# Altium PCB Current-Sensor-Rev1.PcbDoc
Units mil, origin at the board's own origin, x right, y up, seen from the top; angles counter-clockwise.
Board outline 1574.8 x 1574.8 mil, 2 copper layers (Top Layer, Bottom Layer); 25 components, 11 nets, 56 pads, 114 vias.
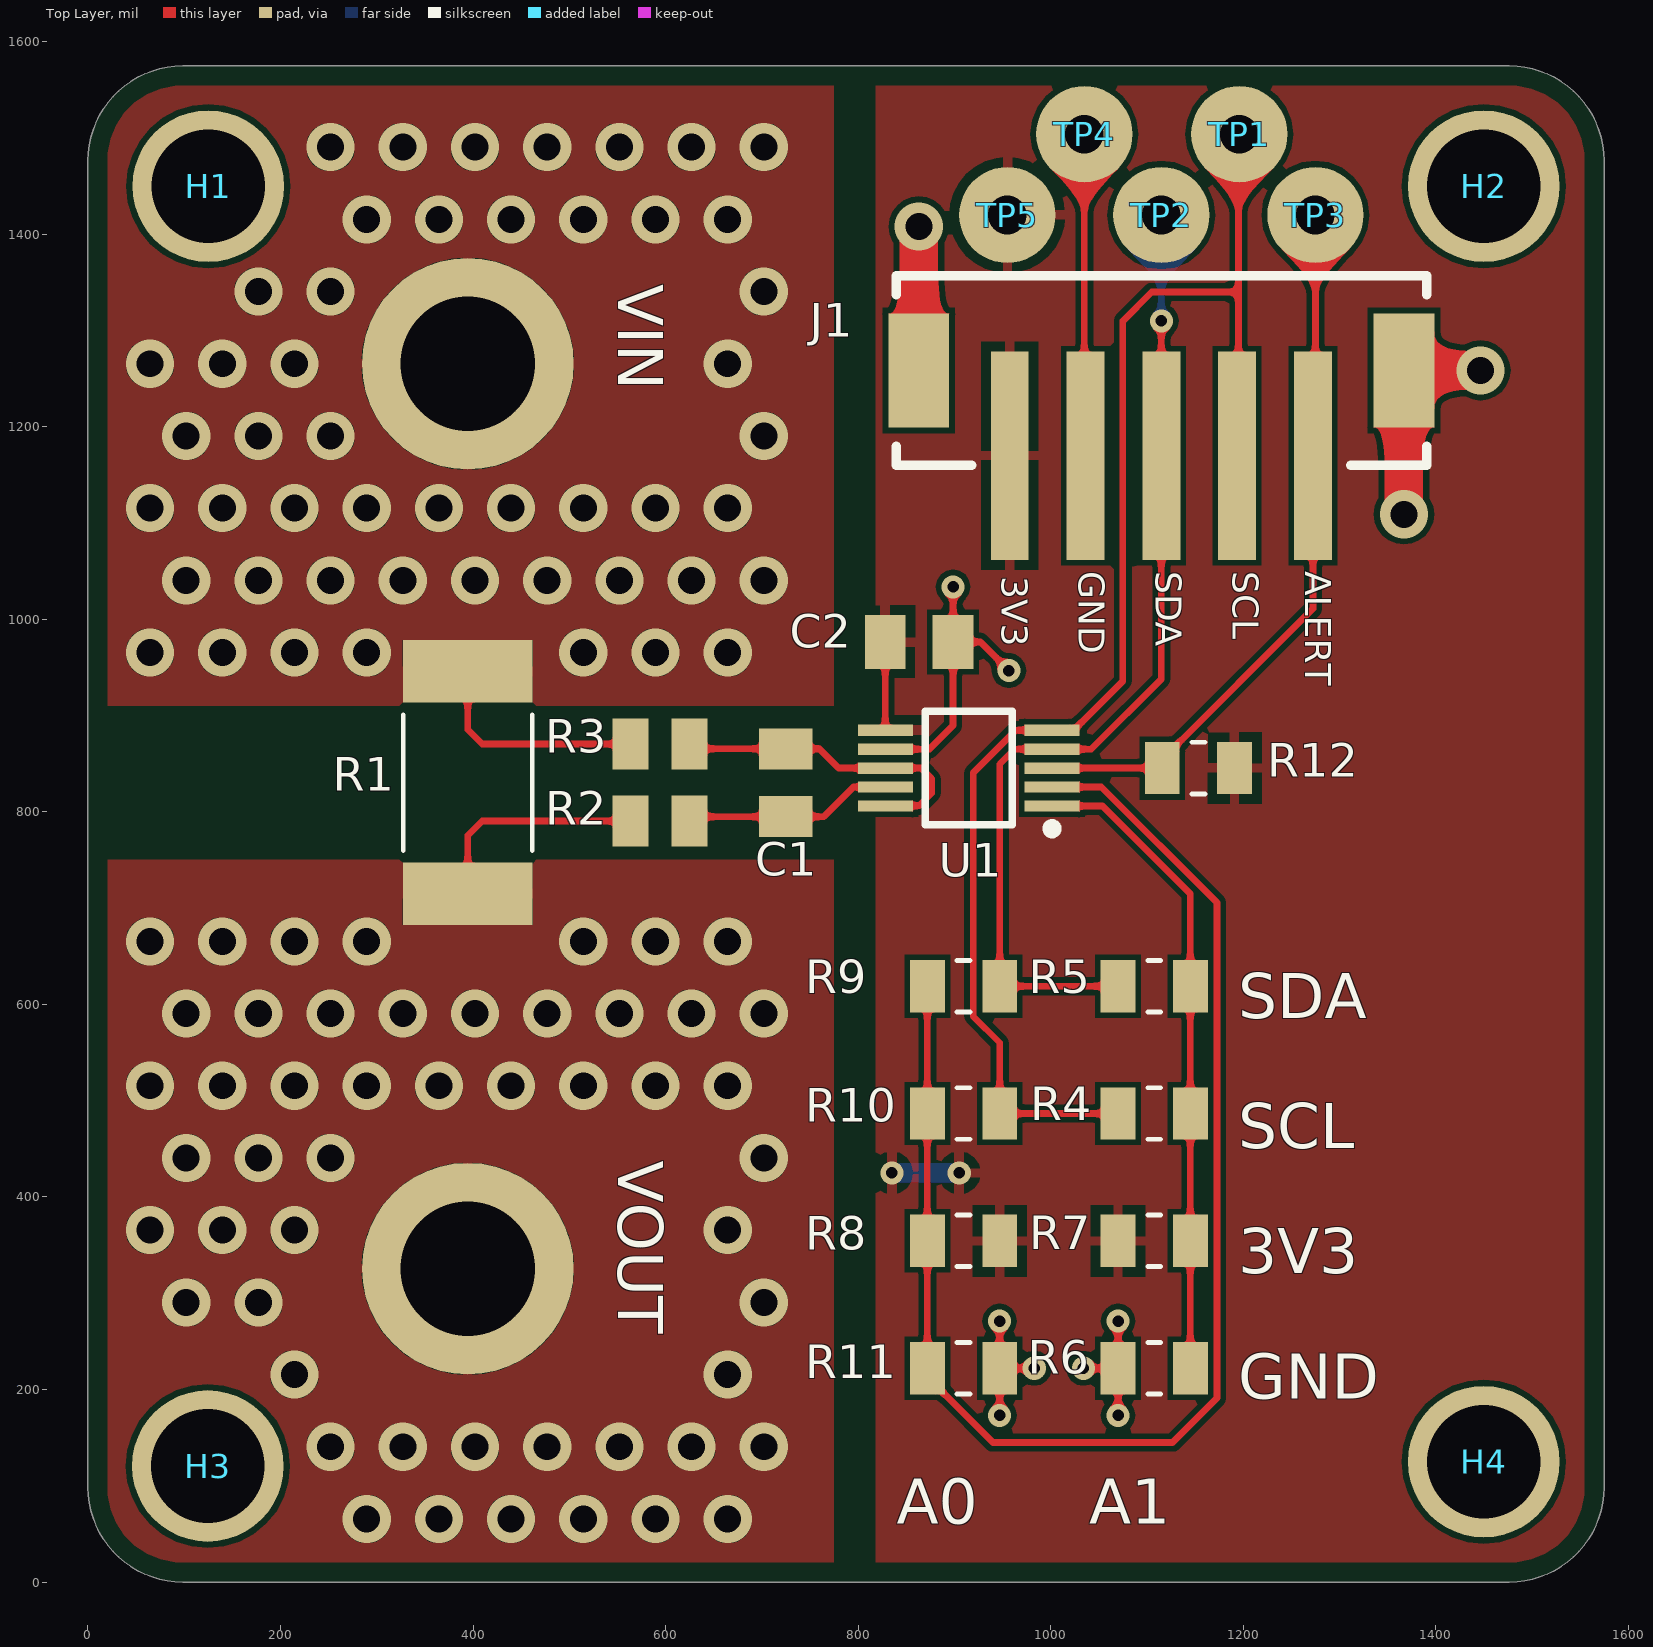
[diagram p0: Top Layer view]
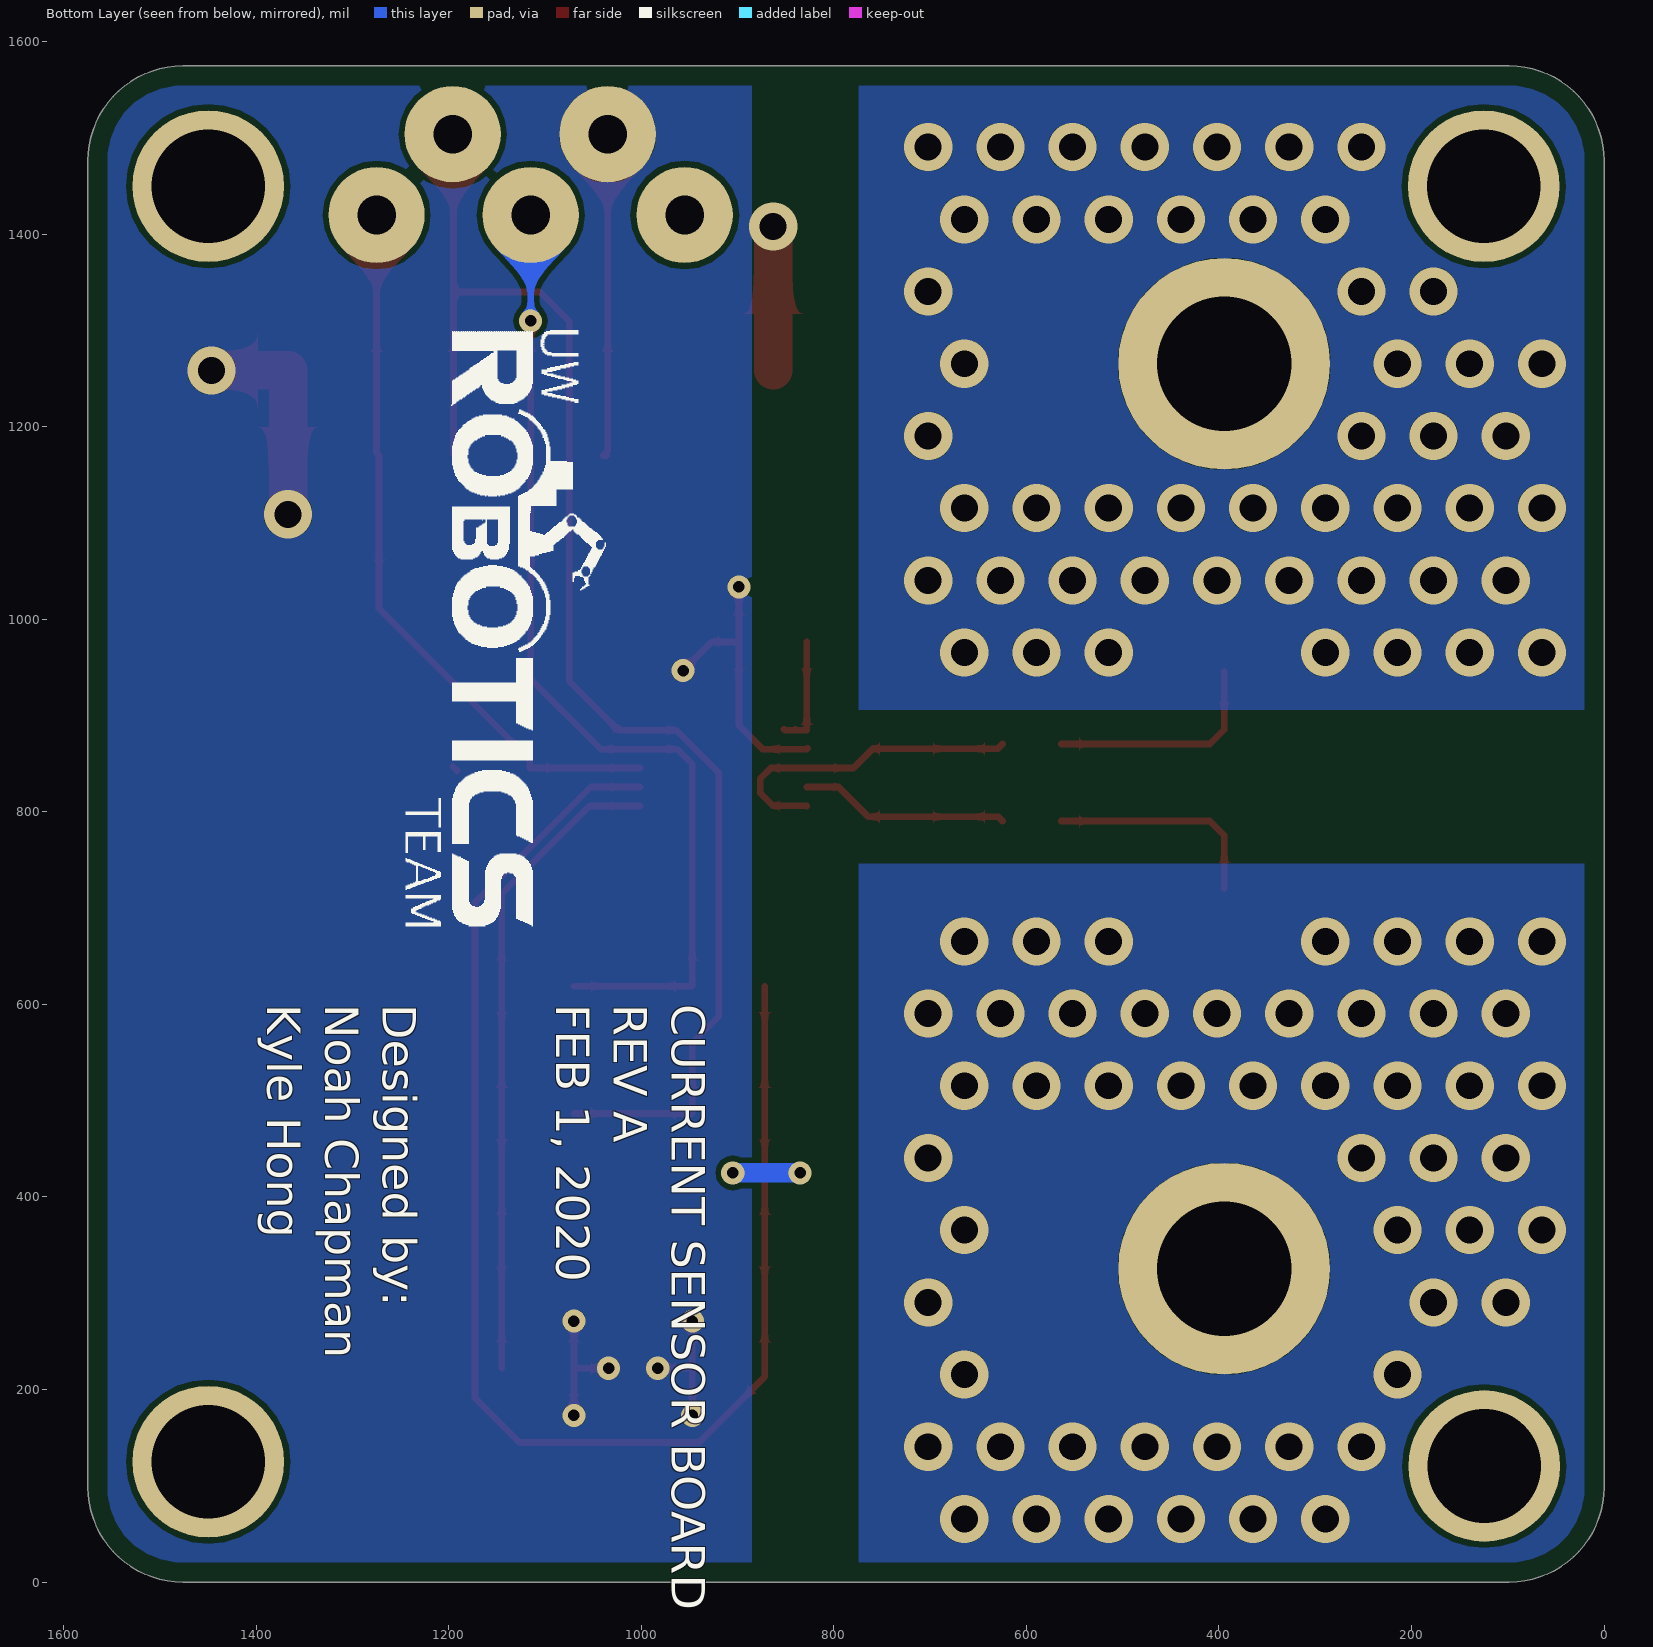
[diagram p1: Bottom Layer view, seen from below]
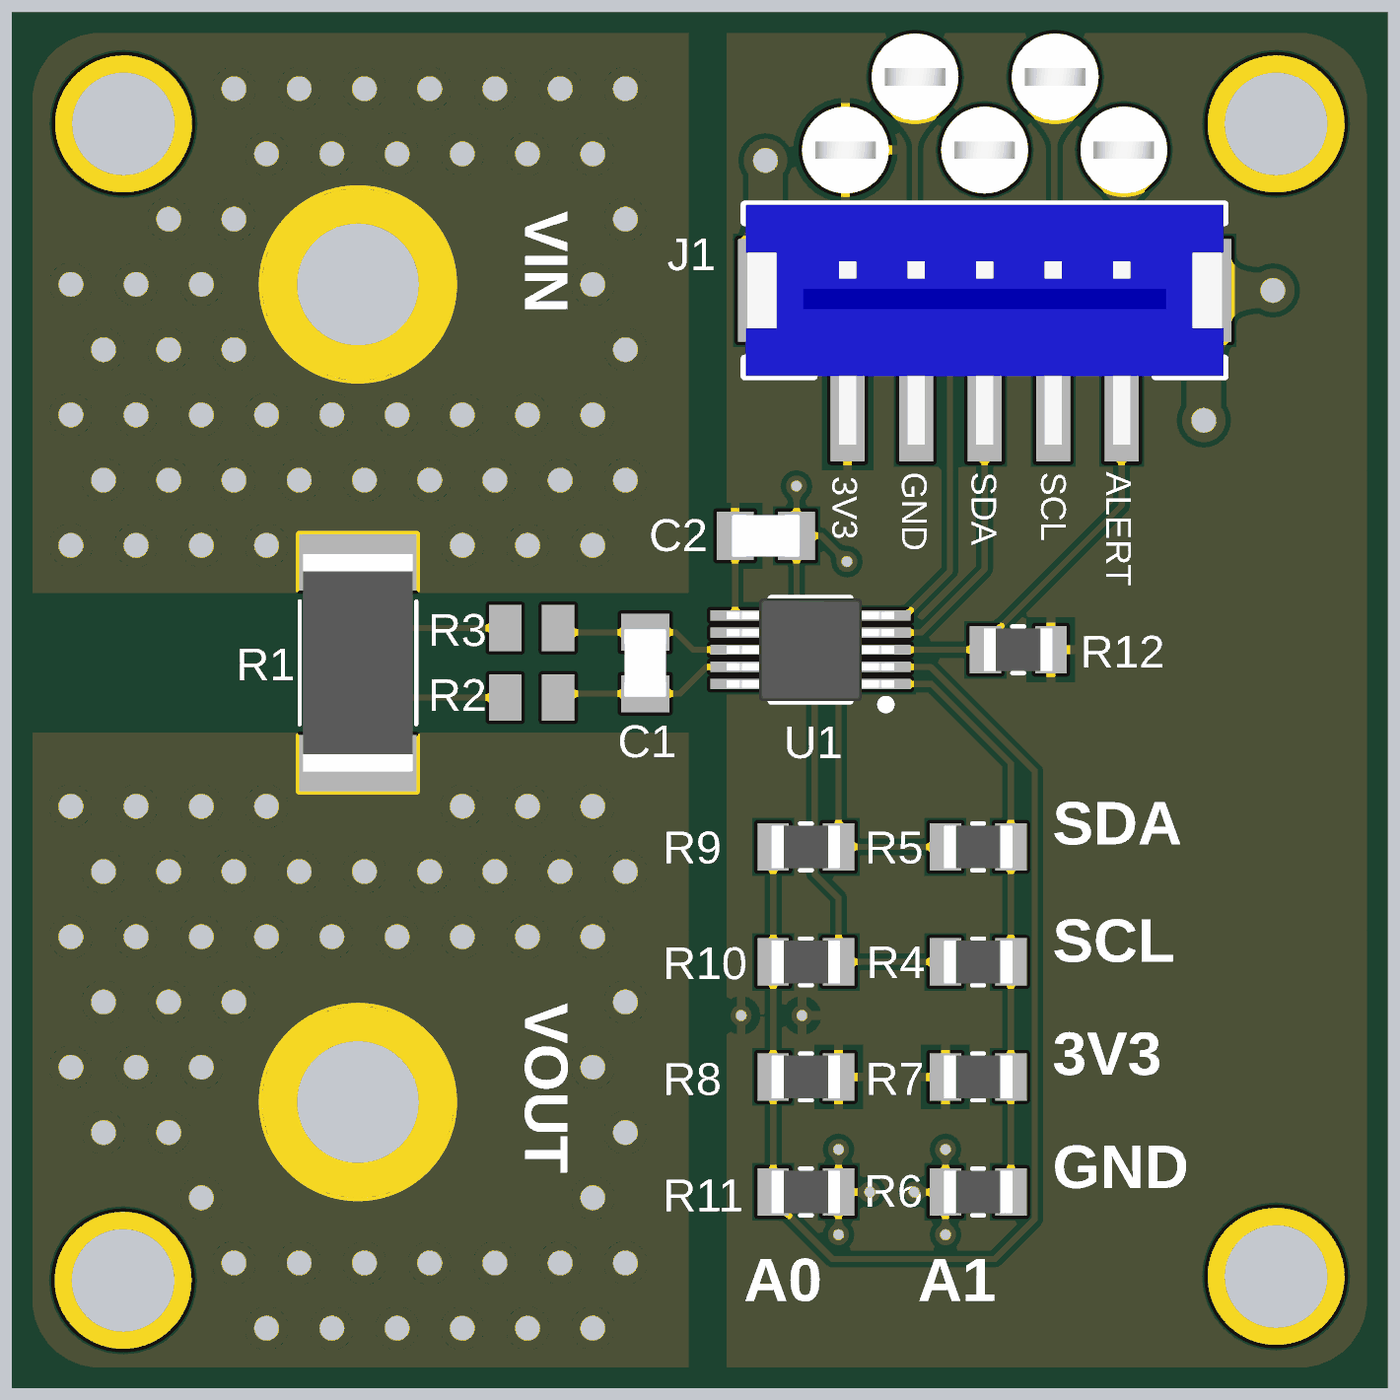
[diagram p2: 3D render of the assembled board from above, using the file's embedded part models]

## Layer stack, top to bottom
Top Solder: solder mask 0.4, Solder Resist, Dk 3.5
Top Layer: signal copper 1.4
Dielectric 1: dielectric 12.6, FR-4, Dk 4.8
Bottom Layer: signal copper 1.4
Bottom Solder: solder mask 0.4, Solder Resist, Dk 3.5

## Board outline
0,98.43 0,1476.38 cw(c98.43,1476.38) 98.43,1574.8 1476.38,1574.8 cw(c1476.38,1476.38) 1574.8,1476.38 1574.8,98.43 cw(c1476.38,98.43) 1476.38,0 98.43,0 cw(c98.43,98.43)

## Design rules (kind name [scope] priority, off if disabled: settings)
BoardOutlineClearance [All] p1: gap=20 ignorepadtopadclearanceinfootprint=FALSE
Clearance [All] p1: gap=6 ignorepadtopadclearanceinfootprint=TRUE
HoleSize [All] p1: absolutevalues=TRUE maxlimit=200 minlimit=1 maxpercent=80.000 minpercent=20.000
MinimumSolderMaskSliver [All] p1: minsoldermaskwidth=6
PolygonConnect 3V3 [InNet('3V3')] p1: connectstyle=Relief reliefconductorwidth=10 reliefentries=4 polygonreliefangle="90 Angle" airgapwidth=10
PolygonConnect "VIN VOUT" [InNet('Vin') vs InNet('Vout')] p2: connectstyle=Direct reliefconductorwidth=20 reliefentries=4 polygonreliefangle="90 Angle" airgapwidth=10
RoutingVias [All] p1: holewidth=12 width=24 viastyle="Through Hole" minholewidth=12 minwidth=24 maxholewidth=28 maxwidth=50
SilkToSolderMaskClearance [IsPad] p1: minsilkscreentomaskgap=6 clearancetoexposedcopper=TRUE
SolderMaskExpansion [All] p1: expansion=4
Width [All] p1: maxlimit=50 minlimit=6 preferedwidth=6 minimp=50.000000 maximp=50.000000 favimp=50.000000
27 further rules are at their usual default settings.

## Components (designator, comment, footprint, x,y, rotation, side; value= is the part's Value field where it differs from the comment)
C1 "CAP_0.1uF_50V_0805" CAPC2012X140N 724.82,830.26 r270 top value=0.1uF
C2 "CAP_0.1uF_50V_0805" CAPC2012X140N 863.44,976.5 r180 top value=0.1uF
H1 "MOUNTING_HOLES" MOUNTING_HOLE 125,1450 r0 top
H2 "MOUNTING_HOLES" MOUNTING_HOLE 1450,1450 r0 top
H3 "MOUNTING_HOLES" MOUNTING_HOLE 124.5,120.5 r0 top
H4 "MOUNTING_HOLES" MOUNTING_HOLE 1450,125 r0 top
J1 "CON_5M_SM4" JST-B5B-SM4-TB 1115,1357.01 r180 top
R1 "RES_20m_2512" RESC6532X75N 394.5,830.5 r270 top value=0.02
R2 "RES_5.1_0805" RESC2013X70X40LL20T20 594.3,790.5 r180 top value=5.1
R3 "RES_5.1_0805" RESC2013X70X40LL20T20 594.3,870.5 r180 top value=5.1
R4 "RES_4K7_0805" RESC2012X60N 1107.5,486.61 r180 top value=4K7
R5 "RES_4K7_0805" RESC2012X60N 1107.5,618.83 r180 top value=4K7
R6 "RES_4K7_0805" RESC2012X60N 1107.5,222.17 r180 top value=4K7
R7 "RES_4K7_0805" RESC2012X60N 1107.5,354.39 r180 top value=4K7
R8 "RES_4K7_0805" RESC2012X60N 909.5,354.39 r0 top value=4K7
R9 "RES_4K7_0805" RESC2012X60N 909.5,618.83 r0 top value=4K7
R10 "RES_4K7_0805" RESC2012X60N 909.5,486.61 r0 top value=4K7
R11 "RES_4K7_0805" RESC2012X60N 909.5,222.17 r0 top value=4K7
R12 "RES_4K7_0805" RESC2012X60N 1153.5,845.5 r0 top value=4K7
TP1 "TESTPOINT_LOOP" TESTPOINT_LOOP 1196,1504 r0 top
TP2 "TESTPOINT_LOOP" TESTPOINT_LOOP 1115,1420 r0 top
TP3 "TESTPOINT_LOOP" TESTPOINT_LOOP 1275,1420 r0 top
TP4 "TESTPOINT_LOOP" TESTPOINT_LOOP 1035,1504 r0 top
TP5 "TESTPOINT_LOOP" TESTPOINT_LOOP 955,1420 r0 top
U1 "INA226AIDGSR" INA226AIDGSR 914.82,845.5 r180 top

## Footprints (in the part's own frame and the unit in brackets; to place one, negate y for a bottom-side part, rotate by r counter-clockwise, add the part's x,y. Pads: shape width x height; smd on the part's side, far side on the other; paste and mask are expansions set on the pad)
CAPC2012X140N [mm]
  rect 1.08x1.42 smd: 1(-0.895,0) 2(0.895,0)
  body extent -1,-0.62 1,0.62, height 1.4
INA226AIDGSR [mm]
  rect 1.45x0.3 smd: 1(-2.2,1) 2(-2.2,0.5) 3(-2.2,0) 4(-2.2,-0.5) 5(-2.2,-1) 6(2.2,-1) 7(2.2,-0.5) 8(2.2,0) 9(2.2,0.5) 10(2.2,1)
  silkscreen extent -2.33,-1.5 1.15,1.73, body extent -2.45,-1.5 2.45,1.5, height 1.06
JST-B5B-SM4-TB [mm]
  rect 1.6x3 smd: 0(-6.4,2.5) 0(6.4,2.5)
  rect 1x5.5 smd: 1(-4,4.75) 2(-2,4.75) 3(0,4.75) 4(2,4.75) 5(4,4.75)
  silkscreen extent -7,0 7,5, body extent -6.98,0 6.98,7, height 6.6
MOUNTING_HOLE [mm]
  round 4 hole 3 unplated: 0(0,0)
RESC2012X60N [mm]
  rect 0.92x1.38 smd: 1(-0.955,0) 2(0.955,0)
  silkscreen extent -0.17,-0.68 0.17,0.68, body extent -1,-0.62 1,0.62, height 0.6
RESC2013X70X40LL20T20 [mm] "Chip Resistor, 2-Leads, Body 2.00x1.25mm, IPC High Density"
  rect 0.95x1.35 smd: 1(-0.775,0) 2(0.775,0)
  body extent -1.1,-0.72 1.1,0.72, height 0.7
RESC6532X75N [mm]
  rect 1.64x3.42 smd: 1(-2.935,0) 2(2.935,0)
  silkscreen extent -1.79,-1.7 1.79,1.7, body extent -3.17,-1.6 3.17,1.6, height 0.65
TESTPOINT_LOOP [mm]
  round 2.54 hole 1.02: 1(0,0)
  body extent -1.27,-1.27 1.27,1.27, height 4.57

## Part data
C1 C2: "CAP CER 0.1UF 50V X7R 0805", Capacitance=100nF, Case/Package=0805, Case Code (Metric)=2012, Dielectric=X7R, Manufacturer 1=Murata, Manufacturer Part Number 1=GCD21BR71H104KA01L, Max Operating Temperature=125°C, Min Operating Temperature=-55°C, Ratings=AEC-Q200, Supplier Part Number 1=490-11955-1-ND, Tolerance=10%, Voltage Rating=50V, Case Code (Imperial)=0805, ComponentLink1Description=https://datasheet.ciiva.com/29537/c03e-29537701.pdf?src-supplier=Digi-Key, ComponentLink1URL=https://datasheet.ciiva.com/29537/c03e-29537701.pdf?src-supplier=Digi-Key, Depth=1.25mm, Height=1.25mm, Length=2mm, Mount="Surface Mount", Supplier 1=Digi-Key, Termination=SMD/SMT, Thickness=0.049inch, Width=0.049inch
H1 H2 H3 H4: "6cm x 6cm"
J1: "CONN HEADER SMD 5POS 2MM", Manufacturer=JST, Manufacturer Part Number=B5B-PH-SM4-TB(LF)(SN), Max Current Rating=2A, Max Voltage Rating=100V, Supplier Part Number 1=455-1737-1-ND, ComponentLink1Description=https://datasheet.ciiva.com/11749/0900766b80ddea81-11749188.pdf?src-supplier=RSComponents, ComponentLink1URL=https://datasheet.ciiva.com/11749/0900766b80ddea81-11749188.pdf?src-supplier=RSComponents, ComponentLink2Description=https://datasheet.ciiva.com/712/eph-712595.pdf?src-supplier=Digi-Key, ComponentLink2URL=https://datasheet.ciiva.com/712/eph-712595.pdf?src-supplier=Digi-Key, ComponentLink3Description=https://datasheet.ciiva.com/712/eph-712596.pdf?src-supplier=Digi-Key, ComponentLink3URL=https://datasheet.ciiva.com/712/eph-712596.pdf?src-supplier=Digi-Key, ComponentLink4Description=https://datasheet.ciiva.com/730/eph-730612.pdf?src-supplier=Digi-Key, ComponentLink4URL=https://datasheet.ciiva.com/730/eph-730612.pdf?src-supplier=Digi-Key, ComponentLink5Description=https://datasheet.ciiva.com/16344/eph-16344920.pdf?src-supplier=Future+Electronics, ComponentLink5URL=https://datasheet.ciiva.com/16344/eph-16344920.pdf?src-supplier=Future+Electronics, Pitch=2mm, Supplier 1=Digi-Key
R1: "RES 0.02 OHM 1% 3W 2512", Manufacturer 1=Riedon, Manufacturer Part Number 1=CSRL3-0R02F8, Supplier Part Number 1=696-1840-1-ND, Pricing 1="1=0.66000, 10=0.47400, 25=0.36920, 50=0.31260, 100=0.24620, 250=0.20836, 500=0.17048, 1000=0.13259 (USD)", RoHS=No, Supplier 1=Digi-Key
R2 R3: "RES SMD 5.1 OHM 5% 1/8W 0805", Manufacturer=Panasonic, Part Number=ERJ-6GEYJ5R1V, Supplier Part Number 1=P5.1ACT-ND, Supplier 1=Digi-Key
R4 R5 R6 R7 R8 R9 R10 R11 R12: "RES SMD 4.7K OHM 5% 1/8W 0805", Case/Package=Molded, Case Code (Imperial)=0805, Case Code (Metric)=2012, Manufacturer 1=Yageo, Manufacturer Part Number 1=RC0805JR-074K7L, Max Operating Temperature=155°C, Min Operating Temperature=-55°C, Power Rating=125mW, Resistance=4.7kR, Supplier Part Number 1=311-4.7KARCT-ND, Temperature Coefficient=100ppm/°C, Tolerance=5%, Voltage Rating=150V, ComponentLink1Description=https://datasheet.ciiva.com/7941/442941-7941973.pdf?src-supplier=Element14, ComponentLink1URL=https://datasheet.ciiva.com/7941/442941-7941973.pdf?src-supplier=Element14, ComponentLink2Description=https://datasheet.ciiva.com/7941/442941-7941974.pdf?src-supplier=Element14, ComponentLink2URL=https://datasheet.ciiva.com/7941/442941-7941974.pdf?src-supplier=Element14, ComponentLink3Description=https://datasheet.ciiva.com/17486/rc0805-17486827.pdf?src-supplier=Future+Electronics, ComponentLink3URL=https://datasheet.ciiva.com/17486/rc0805-17486827.pdf?src-supplier=Future+Electronics, ComponentLink4Description=https://datasheet.ciiva.com/12667/rc0805-12667037.pdf?src-supplier=Mouser, ComponentLink4URL=https://datasheet.ciiva.com/12667/rc0805-12667037.pdf?src-supplier=Mouser, Composition="Thick Film", Contact Plating=Tin,Lead,Matte, Depth=1.25mm, Lead Free="Lead Free", Length=2mm, Military Standard=Not, Packaging="Tape and Reel", Pricing 1="1=0.10000, 10=0.03500, 100=0.01400, 1000=0.00631, 2500=0.00548 (USD)", Radiation Hardening=No, REACH SVHC=Unknown, RoHS=Yes, Stock 1=2755291, Supplier 1=Digi-Key, Termination=SMD/SMT
TP1 TP2 TP3 TP4 TP5: "Loop testpoint through-hole pad", Manufacturer="Keystone Electronics", Manufacturer Part Number 1=5002, Supplier Part Number 1=36-5002-ND, Supplier 1=Digi-Key
U1: "IC MONITOR PWR/CURR BIDIR 10MSOP", Package="MSOP-10 Texas Instruments", Supplier Part Number 1=296-29034-6-ND, Availability=Unavailable, MF="Texas Instruments", MP=INA226AIDGSR, Price=None, SnapEDA_Link=https://www.snapeda.com/parts/INA226AIDGSR/Texas%20Instruments/view-part/53552/?ref=snap, Supplier 1=Digi-Key

## Free pads (board coordinates)
  round 220 hole 140: 2(394.5,1265.5) 3(394.5,325.5)

## Via types
v1: diameter 50, hole 28, Top Layer to Bottom Layer, tented both sides, 103 vias
v2: diameter 24, hole 12, Top Layer to Bottom Layer, tented both sides, 11 vias

## Nets (pads, with @x,y where several pads share a name; then routed paths per layer and width w, separated by ;. In a path a pad name is that pad's centre, name@x,y a point inside that pad or via, vN(x,y) a via of type N, cw(c..) or ccw(c..) an arc to the next point about the centre after c; other vN are vias at no path point)
3V3: C2.2 J1.5 R7.2 R8.2 R12.2 TP5.1 U1.6 | length 193.6
  Top Layer w7: C2.2 U1.6 U1.6@839.19,884.87 ; U1.6@840.05,885.73 U1.6@839.19,884.87 ; U1.6@851.74,885.77 850.84,884.87 U1.6@839.19,884.87 ; R12.2@1191.1,842.5 R12.2@1195.9,847.3
  Bottom Layer w20: v2(835,425) v2(905,425)
A0: R8.1 R9.1 R10.1 R11.1 U1.2 | length 1489.5
  Top Layer w7: R9.1 R10.1 R8.1 R11.1 871.9,213.11 940.02,145 1126.65,145 1172.71,191.07 1172.71,705.67 1052.57,825.81 U1.2
A1: R4.1 R5.1 R6.1 R7.1 U1.1 | length 674.2
  Top Layer w7: U1.1 1053.87,806.13 1145.1,714.9 R5.1 R4.1 R7.1 R6.1
ALERT: J1.1 R12.1 TP3.1 U1.3 | length 754.9
  Top Layer w7: U1.3 R12.1 1115.9,854.55 1272.48,1011.13 J1.1 1275,1172.52 TP3.1
GND: C2.1 J1.0 J1.4 R6.2 R11.2 TP4.1 U1.7 | length 1278.8
  Top Layer w7: U1.7@827.3,866.09 U1.7 874.19,865.18 898.67,889.67 C2.1@898.67,972.9 ; v2(898.67,1033.67) C2.1 926.98,976.5 v2(956.67,946.8) ; v2(947,173) R11.2@947,221.73 ; R11.2@947,222 v2(983,222) ; v2(947,271) 947,222.27 R11.2 ; v2@1033,222 v2(1034,222) R6.2@1070,222 ; TP4.1 1035,1175 1040,1170 J1.4 ; v2(1070,173) R6.2@1070,221.73 ; R6.2@1070,222.27 v2(1070,271)
  Top Layer w40: J1.0@863.03,1258.58 v1(863.03,1408.03) ; v1(1366.97,1109.13) 1366.97,1258.58 v1(1446.42,1258.58)
NetC1_1: C1.1 R3.1 U1.8 U1.10 | length 335.4
  Top Layer w7: R3.1 629.82,865.5 C1.1 759.82,865.5 779.82,845.5 U1.8 865.5,845.5 876.5,834.5 876.5,819.5 863.5,806.49 828.57,806.49 U1.10
NetC1_2: C1.2 R2.1 U1.9 | length 218
  Top Layer w7: R2.1 629.34,795.02 C1.2 764.34,795.02 795.13,825.81 U1.9
SCL: J1.2 R4.2 R10.2 TP1.1 U1.5 | length 1524.2
  Top Layer w7: R4.2 R10.2 947.1,560.12 919.49,587.73 919.49,840.32 964.04,884.87 U1.5 1024.07,884.87 1075,935.8 1075,1310 1105,1340 1195,1340 ; J1.2 1195,1171.26 1195,1340 ; TP1.1@1195,1504 1195,1340
SDA: J1.3 R5.2 R9.2 TP2.1 U1.4 | length 1040.1
  Top Layer w7: R5.2 R9.2 947.1,849.55 962.74,865.18 U1.4 1042.18,865.18 1115,938 J1.3 v2(1115,1310)
  Bottom Layer w7: v2(1115,1310) TP2.1
Vin: pad.2 R1.1 R3.2 | length 236.1
  Top Layer w7: R1.1 394.5,885.5 409.5,870.5 R3.2
  other v1: 64.5,965.5 139.5,965.5 214.5,965.5 289.5,965.5 514.5,965.5 589.5,965.5 664.5,965.5 102,1040.5 177,1040.5 252,1040.5 327,1040.5 402,1040.5 477,1040.5 552,1040.5 627,1040.5 702,1040.5 64.5,1115.5 139.5,1115.5 214.5,1115.5 289.5,1115.5 364.5,1115.5 439.5,1115.5 514.5,1115.5 589.5,1115.5 664.5,1115.5 102,1190.5 177,1190.5 252,1190.5 702,1190.5 64.5,1265.5 139.5,1265.5 214.5,1265.5 664.5,1265.5 177,1340.5 252,1340.5 702,1340.5 289.5,1415.5 364.5,1415.5 439.5,1415.5 514.5,1415.5 589.5,1415.5 664.5,1415.5 252,1490.5 327,1490.5 402,1490.5 477,1490.5 552,1490.5 627,1490.5 702,1490.5
Vout: pad.3 R1.2 R2.2 | length 230.5
  Top Layer w7: R1.2@394.5,720.5 394.5,775.5 409.5,790.5 R2.2
  other v1: 289.5,65.5 364.5,65.5 439.5,65.5 514.5,65.5 589.5,65.5 664.5,65.5 252,140.5 327,140.5 402,140.5 477,140.5 552,140.5 627,140.5 702,140.5 214.5,215.5 664.5,215.5 102,290.5 177,290.5 702,290.5 64.5,365.5 139.5,365.5 214.5,365.5 664.5,365.5 102,440.5 177,440.5 252,440.5 702,440.5 64.5,515.5 139.5,515.5 214.5,515.5 289.5,515.5 364.5,515.5 439.5,515.5 514.5,515.5 589.5,515.5 664.5,515.5 102,590.5 177,590.5 252,590.5 327,590.5 402,590.5 477,590.5 552,590.5 627,590.5 702,590.5 64.5,665.5 139.5,665.5 214.5,665.5 289.5,665.5 514.5,665.5 589.5,665.5 664.5,665.5
pads on no net: H1.0 H2.0 H3.0 H4.0

## Polygon pours and split planes (outlines as drawn)
3V3 on Top Layer "3V3_L01_P016" (solid, pour order 16): 818.4,-4.5 818.4,1570.3 1574.3,1570.3 1574.3,-4.5
Vout on Top Layer "VOUT_L01_P008" (solid, pour order 8): 0,750.5 774.5,750.5 774.5,0 0,0
Vin on Top Layer "VIN_L01_P004" (solid, pour order 4): 0,1580.5 774.5,1580.5 774.5,910.5 0,910.5
GND on Bottom Layer "Bottom Layer-GND" (solid, pour order 14): 885.33,-4.5 885.33,1570.3 1574.3,1570.3 1574.3,-4.5
Vin on Bottom Layer "VIN_L02_P012" (solid, pour order 12): -0.5,1575.99 774,1575.99 774,905.99 -0.5,905.99
Vout on Bottom Layer "VOUT_L02_P010" (solid, pour order 10): -0.5,745.99 774,745.99 774,-4.5 -0.5,-4.5

## Silkscreen, mask and mechanical layers (free items; w line width, h text height)
Top Overlay:
  text "VIN" at 535,1347.89 h80 r270
  text "GND" at 1020,1050 h46.5 r270
  text "SDA" at 1100,1050 h46.5 r270
  text "SCL" at 1180,1050 h46.5 r270
  text "ALERT" at 1255,1050 h46.5 r270
  text "3V3" at 940,1045 h46.5 r270
  text "SDA" at 1195,570 h80
  text "VOUT" at 535,437.56 h80 r270
  text "SCL" at 1195,435 h80
  text "3V3" at 1195,305 h80
  text "GND" at 1195,175 h80
  text "A0" at 840,45 h80
  text "A1" at 1040,45 h80
Bottom Overlay:
  drawing of 16 lines, arcs and shapes, not listed
  text "CURRENT SENSOR BOARD / REV A / FEB 1, 2020" at 1100,600 h60 r90
  text "Designed by: / Noah Chapman / Kyle Hong" at 1400,600 h60 r90
Board Outline:
  the board outline again, w7
Mechanical 4:
  lines w10: -0.5,-112.93 -0.5,-92.93 ; 59.5,-122.93 -0.5,-102.93 ; 59.5,-82.93 -0.5,-102.93 ; 396.02,-102.93 -0.5,-102.93 ; 1177.78,-102.93 1574.3,-102.93 ; 1514.3,-122.93 1574.3,-102.93 ; 1514.3,-82.93 1574.3,-102.93 ; 1574.3,-112.93 1574.3,-92.93 ; 1652.73,55.5 1672.73,-4.5 ; 1652.73,1510.3 1672.73,1570.3 ; 1662.73,-4.5 1682.73,-4.5 ; 1662.73,1570.3 1682.73,1570.3 ; 1672.73,392.02 1672.73,-4.5 ; 1672.73,1173.78 1672.73,1570.3 ; 1692.73,55.5 1672.73,-4.5 ; 1692.73,1510.3 1672.73,1570.3
  text "1574.803 (mil)" at 1708.72,402.02 h60 r90
  text "1574.803 (mil)" at 406.02,-138.92 h60